# Altium PCB HASEL_Pair_Dual_Polarity.PcbDoc
Units mm, origin at the board's own origin, x right, y up, seen from the top; angles counter-clockwise.
Board outline 172.59 x 105.79 mm, 2 copper layers (Top Layer, Bottom Layer); 64 components, 65 nets, 264 pads, 50 vias.
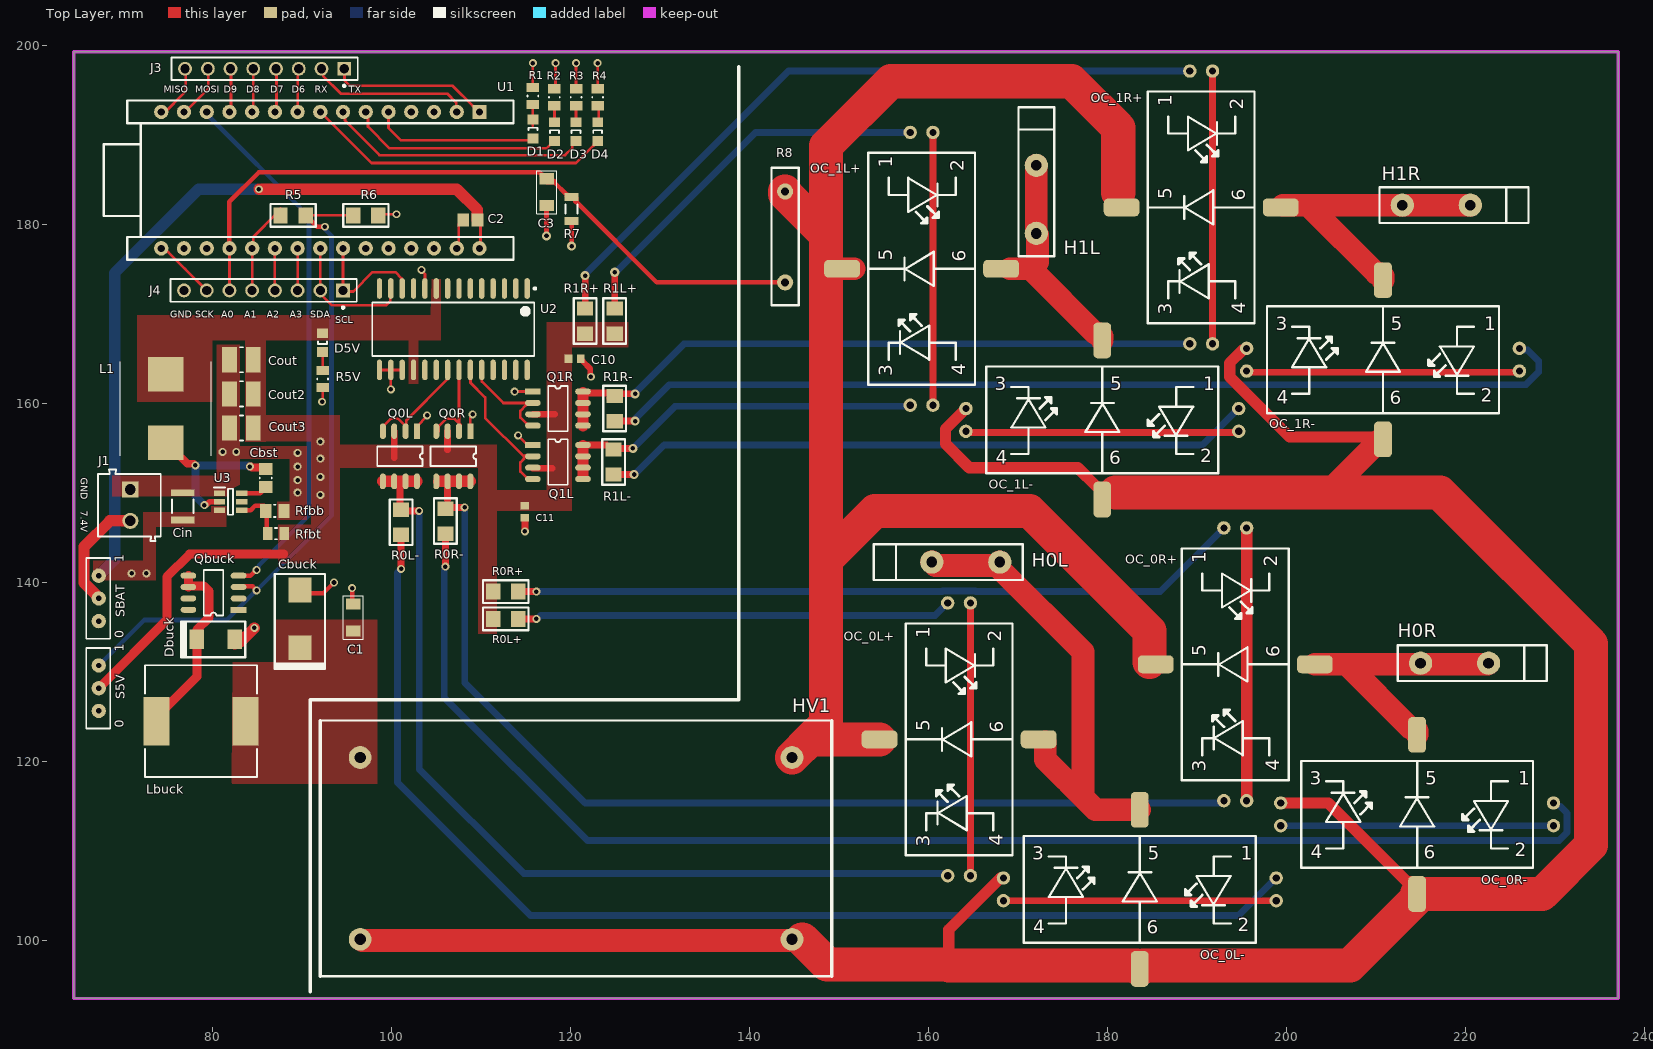
[diagram p0: Top Layer view]
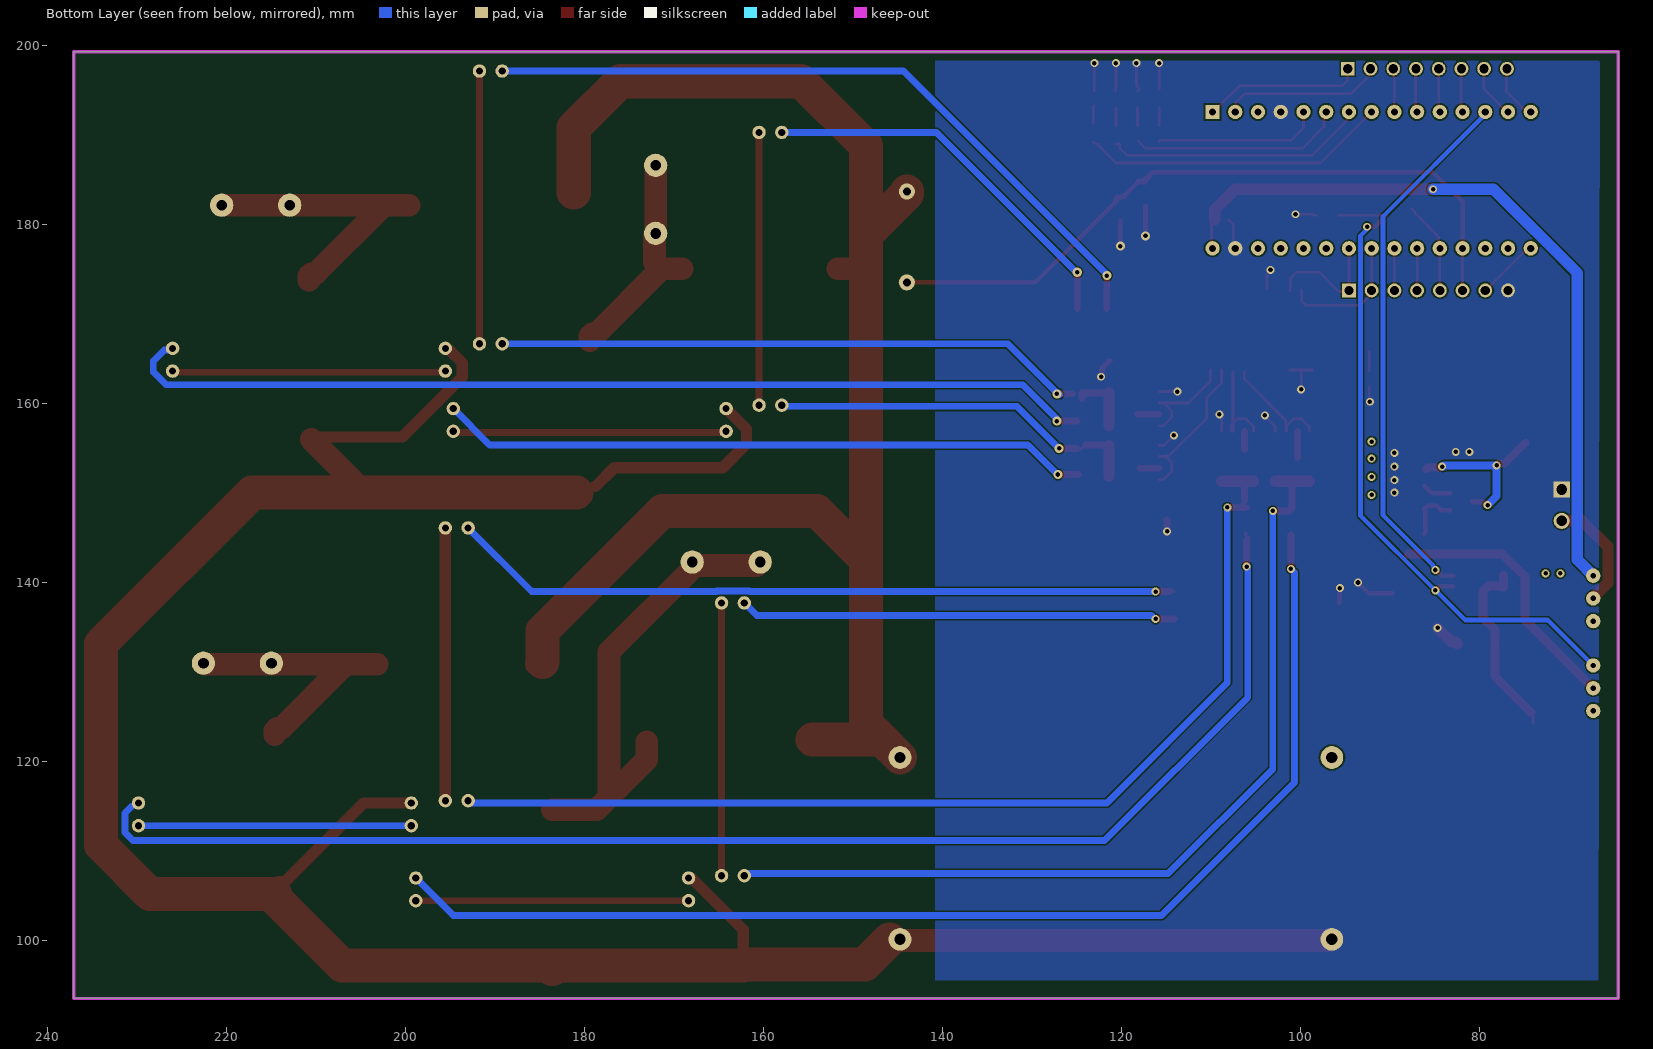
[diagram p1: Bottom Layer view, seen from below]

## Layer stack, top to bottom
Top Solder: solder mask 0.0102, Solder Resist, Dk 3.5
Top Layer: signal copper 0.0356
Dielectric 1: dielectric 0.32, FR-4, Dk 4.8
Bottom Layer: signal copper 0.0356
Bottom Solder: solder mask 0.0102, Solder Resist, Dk 3.5

## Board outline
64.516,93.472 237.109,93.472 237.109,199.263 64.516,199.263

## Design rules (kind name [scope] priority, off if disabled: settings)
Clearance [All] p1: gap=0.191 ignorepadtopadclearanceinfootprint=TRUE
PolygonConnect [All] p1: connectstyle=Direct reliefconductorwidth=0.254 reliefentries=4 polygonreliefangle="90 Angle" airgapwidth=0.254
RoutingVias [All] p1: holewidth=0.711 width=1.27 viastyle="Through Hole" minholewidth=0.381 minwidth=0.635 maxholewidth=0.711 maxwidth=1.27
SilkToSilkClearance [All] p1: silktosilkclearance=0.178
SilkToSolderMaskClearance [IsPad] p1: minsilkscreentomaskgap=0.152 clearancetoexposedcopper=TRUE
SolderMaskExpansion [All] p1: expansion=0.102 istentingtop=FALSE
Width [All] p1: maxlimit=5.08 minlimit=0.254 preferedwidth=0.305 minimp=50.000000 maximp=50.000000 favimp=50.000000
28 further rules are at their usual default settings.

## Classes and differential pairs
component class Control: C1 C2 Cbst Cbuck Cin Cout Cout2 Cout3 D1 D2 D3 D4 D5V Dbuck HV1 J1 J3 J4 L1 Lbuck Qbuck R1 R2 R3 R4 R5 R5V R6 Rfbb Rfbt S5V SBAT U1 U2 U3
component class Hbridge0: C3 C10 C11 H0L H0R H1L H1R OC_0L+ OC_0L- OC_0R+ OC_0R- OC_1L+ OC_1L- OC_1R+ OC_1R- Q0L Q0R Q1L Q1R R0L+ R0L- R0R+ R0R- R1L+ R1L- R1R+ R1R- R7 R8

## Components (designator, comment, footprint, x,y, rotation, side; value= is the part's Value field where it differs from the comment)
C1 "Capacitor 10uF" "1206 CAP" 95.758,136.041 r270 top value=10uF
C2 "C0805C104K5RACTU" CAPC2013X88X50NL20T25 108.839,180.467 r0 top
C3 "Capacitor 0.33uF" "1206 CAP" 117.384,183.575 r90 top value=0.33uF
C10 "GRM1885C1H101JA01D" CAPC1608X90X35NL10T15 120.483,164.973 r180 top
C11 "GRM1885C1H101JA01D" CAPC1608X90X35NL10T15 114.935,147.868 r90 top
Cbst "CAP 100nF 50V 0805(2012)" CAPC0805(2012)100_M 85.979,151.638 r90 top value=100nF
Cbuck "Capacitor 220uF (Polarized)" "SMD 7343 - Pol" 89.789,135.89 r270 top value=220uF
Cin "GRM32ER61C226KE20L" MURA-1210_H_2.7_L 76.708,148.463 r270 top
Cout "CL32B106KBJNNWE" FP-CL32-IPC_B 83.257,164.846 r180 top
Cout2 "CL32B106KBJNNWE" FP-CL32-IPC_B 83.257,161.036 r180 top
Cout3 "CL32B106KBJNNWE" FP-CL32-IPC_B 83.257,157.226 r180 top
D1 "150080SS75000" 0805_A 115.824,190.627 r270 top
D2 "150080VS75000" 0805_A 118.237,190.339 r270 top
D3 "150080SS75000" 0805_A 120.65,190.339 r270 top
D4 "150080VS75000" 0805_A 123.063,190.339 r270 top
D5V "150080VS75000" 0805_A 92.329,166.751 r90 top
Dbuck "Schottky Diode" "Schottky Diode" 80.391,133.604 r180 top
H0L "HV Socket" "HV Socket 2mm" 160.401,142.24 r0 top
H0R "HV Socket" "HV Socket 2mm" 222.611,130.937 r180 top
H1L "HV Socket" "HV Socket 2mm" 172.085,186.563 r270 top
H1R "HV Socket" "HV Socket 2mm" 220.579,182.118 r180 top
HV1 "5VV9 (5W)" 5VV9 92.075,95.948 r0 top
J1 "PWR Terminal Block" 691103110002 70.739,148.59 r270 top
J3 "PPPC081LFBN-RC" SLIN-PPPC081LFBN-RC_V 85.852,197.358 r180 top
J4 "PPPC081LFBN-RC" SLIN-PPPC081LFBN-RC_V 85.725,172.593 r180 top
L1 "7443251600" WE-HCI_105023 74.803,159.385 r90 top
Lbuck "7447709821" WE-PD-XXL 78.74,124.46 r0 top
OC_0L+ "OC100HG" OC100G 163.449,122.428 r180 top
OC_0L- "OC100HG" OC100G 183.642,105.664 r90 top
OC_0R+ "OC100HG" OC100G 194.31,130.81 r180 top
OC_0R- "OC100HG" OC100G 214.63,114.046 r90 top
OC_1L+ "OC100HG" OC100G 159.258,175.006 r180 top
OC_1L- "OC100HG" OC100G 179.451,158.115 r90 top
OC_1R+ "OC100HG" OC100G 190.5,181.864 r180 top
OC_1R- "OC100HG" OC100G 210.82,164.846 r90 top
Q0L "Dual MOSFET" SO-8 102.87,156.857 r270 top
Q0R "Dual MOSFET" SO-8 108.839,156.857 r270 top
Q1L "Dual MOSFET" SO-8 115.824,155.321 r0 top
Q1R "Dual MOSFET" SO-8 115.824,161.29 r0 top
Qbuck "Dual MOSFET" SO-8 82.931,136.906 r180 top
R0L+ "Resistor" "1206 R" 114.179,135.89 r90 top value=27R
R0L- "Resistor" "1206 R" 101.092,148.082 r180 top value=27R
R0R+ "Resistor" "1206 R" 114.179,138.938 r90 top value=27R
R0R- "Resistor" "1206 R" 106.045,148.209 r180 top value=27R
R1 "ERJ-6GEYJ161V" RESC0805(2012)_N 115.824,194.31 r270 top value="160.00 Ohm"
R1L+ "Resistor" "1206 R" 124.968,170.561 r180 top value=27R
R1L- "Resistor" "1206 R" 124.841,154.813 r180 top value=27R
R1R+ "Resistor" "1206 R" 121.666,170.561 r180 top value=27R
R1R- "Resistor" "1206 R" 124.968,160.788 r180 top value=27R
R2 "ERJ-6GEYJ161V" RESC0805(2012)_N 118.237,194.183 r270 top value="160.00 Ohm"
R3 "ERJ-6GEYJ161V" RESC0805(2012)_N 120.65,194.183 r270 top value="160.00 Ohm"
R4 "ERJ-6GEYJ161V" RESC0805(2012)_N 123.063,194.183 r270 top value="160.00 Ohm"
R5 "Resistor" "1206 R" 90.43,180.975 r90 top value=1k
R5V "ERJ-6GEYJ161V" RESC0805(2012)_N 92.329,162.687 r90 top value="160.00 Ohm"
R6 "Resistor" "1206 R" 98.558,180.975 r90 top value=1k
R7 "ERJ-8ENF8062V" RESC3216X70X50LL05T20 120.142,181.682 r90 top
R8 "Resistor" "HV resistor" 144.018,173.482 r90 top value=100M
Rfbb "CRCW080513K7FKEA" RESC2013X50X30ML20T20 86.995,147.955 r180 top
Rfbt "CRCW0805100KFKEA" RESC2013X50X30NL20T20 87.122,145.415 r0 top
S5V "Slider Switch" "Slide Switch" 67.31,128.143 r180 top
SBAT "Slider Switch" "Slide Switch" 67.31,138.176 r180 top
U1 "Arduino Nano" "Arduino Nano" 104.775,192.532 r270 top
U2 "MCP23017-E/SO" SOIC-SO28_N 106.934,168.253 r270 top
U3 "TPS54308DDCR" SOT95P280X100-6N 82.042,148.971 r0 top

## Footprints (in the part's own frame and the unit in brackets; to place one, negate y for a bottom-side part, rotate by r counter-clockwise, add the part's x,y. Pads: shape width x height; smd on the part's side, far side on the other; paste and mask are expansions set on the pad)
5VV9 [mil]
  round 100 hole 50: 1(175,962.5) 2(175,162.5) 3(2075,962.5) 4(2075,162.5)
  silkscreen extent 0,0 2250,1125, body extent -5,0 2250,1125, height 10
0805_A [mm] "Chip LED, 2-Leads, Body 2.0x1.3mm, IPC Medium Density"
  rect 1.1x1.2 smd: 1(-1.05,0) 2(1.05,0)
  silkscreen extent -0.15,-0.5 0.15,0.5, body extent -1,-0.62 1,0.63, height 0.68
"1206 CAP" [mm]
  rect 1.25x1.6 smd: 1(-1.5,0) 2(1.5,0)
  silkscreen extent -2.41,-1.1 2.41,1.1, body extent -1.55,-0.8 1.55,0.8, height 1.05
"1206 R" [mm]
  rect 1.8x1.6 smd: 1(0,0) 2(0,2.8)
  silkscreen extent -1.27,-1.14 1.27,3.94, body extent -0.8,-0.4 0.8,3.2, height 0.25
691103110002 [mm] "3,50mm - modular - blue - Horizontal wire entry - Pressure clamp - 8,4mm height - 02p"
  rect 1.8x1.8 hole 1.2: 1(-1.75,0.1)
  round 1.8 hole 1.2: 2(1.75,0.1)
  silkscreen extent -4,-3.5 4,3.5, body extent -4,-3.5 4,3.5, height 8.45
"Arduino Nano" [mm]
  rect 1.6x1.6 hole 0.8: 1(0,5.08)
  round 1.6 hole 0.8: 2(0,2.54) 3(0,0) 4(0,-2.54) 5(0,-5.08) 6(0,-7.62) 7(0,-10.16) 8(0,-12.7) 9(0,-15.24) 10(0,-17.78) 11(0,-20.32) 12(0,-22.86) 13(0,-25.4) 14(0,-27.94) 15(0,-30.48) 16(15.24,5.08) 17(15.24,2.54) 18(15.24,0) 19(15.24,-2.54) 20(15.24,-5.08) 21(15.24,-7.62) 22(15.24,-10.16) 23(15.24,-12.7) 24(15.24,-15.24) 25(15.24,-17.78) 26(15.24,-20.32) 27(15.24,-22.86) 28(15.24,-25.4) 29(15.24,-27.94) 30(15.24,-30.48)
  silkscreen extent -1.27,-36.89 16.51,8.89, body extent -1.4,-34.29 16.51,8.89, height 8.26
CAPC0805(2012)100_M [mm] "Chip Capacitor, Body 2.0x1.2mm, Height 1.0mm, IPC Low Density"
  rect 1.35x1.55 smd: 1(-1,0) 2(1,0)
  silkscreen extent -0.05,-0.67 0.05,0.67, body extent -1.1,-0.72 1.1,0.72, height 1
CAPC1608X90X35NL10T15 [mm] "Chip Capacitor, 2-Leads, Body 1.60x0.80mm, IPC Medium Density"
  rect 0.85x0.95 smd: 1(-0.675,0) 2(0.675,0)
  body extent -0.85,-0.45 0.85,0.45, height 0.9
CAPC2013X88X50NL20T25 [mm] "Chip Capacitor, 2-Leads, Body 2.00x1.25mm, IPC Medium Density"
  rect 1.3x1.45 smd: 1(-0.8,0) 2(0.8,0)
  body extent -1.1,-0.72 1.1,0.72, height 0.88
FP-CL32-IPC_B [mm]
  rect 1.653x2.804 smd paste+0 mask+0: 1(-1.325,0) 2(1.325,0)
  silkscreen extent -0.2,-1.4 0.2,1.4, body extent -2.4,-1.65 2.4,1.65, height 0.25
"HV resistor" [mm]
  round 1.8 hole 0.9 mask+0.102: 1(-0.002,0)
  round 1.8 hole 0.9: 2(10.16,0)
  silkscreen extent -2.54,-1.5 12.83,1.52, body extent -2.54,-1.27 12.83,1.27, height 8.64
"HV Socket 2mm" [mm]
  round 2.6 hole 1.2: 1(0,0) 2(7.6,0)
  silkscreen extent -6.5,-2 10.16,2, body extent -6.4,-2 8.5,2.1, height 6
MURA-1210_H_2.7_L [mm] "Chip Capacitor, 2-Leads, Body 3.5x2.7mm, IPC High Density"
  rect 0.75x2.6 smd: 1(-1.525,0) 2(1.525,0)
  silkscreen extent -0.75,-1.2 0.75,1.2, body extent -1.75,-1.35 1.75,1.35, height 2.7
OC100G [mm]
  round 1.5 hole 0.8: 1(1.27,-15.24) 2(-1.27,-15.24) 3(1.27,15.24) 4(-1.27,15.24)
  rrect50% 4x2 smd: 5(8.89,0) 6(-8.89,0)
  silkscreen extent -5.97,-12.95 5.97,12.95, body extent -9.53,-16.51 9.53,16.51, height 8.13
RESC0805(2012)_N [mm] "Chip Resistor, Body 2.0x1.3mm, IPC Medium Density"
  rect 1.05x1.4 smd: 1(-0.95,0) 2(0.95,0)
  silkscreen extent -0.05,-0.6 0.05,0.6, body extent -1.1,-0.67 1.1,0.68, height 0.7
RESC2013X50X30ML20T20 [mm] "Chip Resistor, 2-Leads, Body 2.00x1.25mm, IPC Low Density"
  rect 1.25x1.55 smd: 1(-1.025,0) 2(1.025,0)
  silkscreen extent -0.1,-0.67 0.1,0.67, body extent -1.1,-0.72 1.1,0.72, height 0.5
RESC2013X50X30NL20T20 [mm] "Chip Resistor, 2-Leads, Body 2.00x1.25mm, IPC Medium Density"
  rect 1.05x1.45 smd: 1(-0.925,0) 2(0.925,0)
  silkscreen extent -0.1,-0.63 0.1,0.63, body extent -1.1,-0.72 1.1,0.72, height 0.5
RESC3216X70X50LL05T20 [mm] "Chip Resistor, 2-Leads, Body 3.20x1.60mm, IPC High Density"
  rect 0.9x1.55 smd: 1(-1.325,0) 2(1.325,0)
  silkscreen extent -0.5,-0.67 0.5,0.67, body extent -1.63,-0.82 1.62,0.82, height 0.7
"Schottky Diode" [mm]
  rect 1.62x2.18 smd: 1(-2.11,0) 2(2.11,0)
  silkscreen extent -3.3,-2 3.9,2
"Slide Switch" [mm]
  round 1.6 hole 0.6: 1(0,2.54) 2(0,0) 3(0,-2.54)
  silkscreen extent -1.3,-4.5 1.4,4.5, body extent -1,-4 4.5,4, height 0.25
SLIN-PPPC081LFBN-RC_V [mm] "THD, 8-Leads, Body 20.82x2.54mm, Pitch 2.54mm"
  rect 1.55x1.55 hole 1.02: 1(-8.89,0)
  round 1.55 hole 1.02: 2(-6.35,0) 3(-3.81,0) 4(-1.27,0) 5(1.27,0) 6(3.81,0) 7(6.35,0) 8(8.89,0)
  silkscreen extent -10.41,-1.27 10.41,2.04, body extent -10.41,-1.27 10.41,1.27, height 8.5
"SMD 7343 - Pol" [mm]
  rect 2.77x2.55 smd: 1(3.22,0) 2(-3.22,0)
  silkscreen extent -5,-2.8 5.6,2.8
SO-8 [mm]
  rect 1.75x0.67 smd: 1(0,0)
  oval 1.75x0.67 smd: 2(0,-1.27) 3(0,-2.54) 4(0,-3.81) 5(5.6,-3.81) 6(5.6,-2.54) 7(5.6,-1.27) 8(5.6,0)
  silkscreen extent 1.71,-4.44 3.89,0.64
SOIC-SO28_N [mm] "SOIC, 28-Leads, Body 17.9x7.5mm, Pitch 1.27mm, IPC Medium Density"
  oval 2.3x0.6 smd: 1(-4.55,8.255) 2(-4.55,6.985) 3(-4.55,5.715) 4(-4.55,4.445) 5(-4.55,3.175) 6(-4.55,1.905) 7(-4.55,0.635) 8(-4.55,-0.635) 9(-4.55,-1.905) 10(-4.55,-3.175) 11(-4.55,-4.445) 12(-4.55,-5.715) 13(-4.55,-6.985) 14(-4.55,-8.255) 15(4.55,-8.255) 16(4.55,-6.985) 17(4.55,-5.715) 18(4.55,-4.445) 19(4.55,-3.175) 20(4.55,-1.905) 21(4.55,-0.635) 22(4.55,0.635) 23(4.55,1.905) 24(4.55,3.175) 25(4.55,4.445) 26(4.55,5.715) 27(4.55,6.985) 28(4.55,8.255)
  silkscreen extent -4.67,-9.05 3,9.23, body extent -3.8,-9.05 3.8,9.05, height 2.65
SOT95P280X100-6N [mm]
  rect 1.25x0.6 smd: 1(-1.25,0.95) 2(-1.25,0) 3(-1.25,-0.95) 4(1.25,-0.95) 5(1.25,0) 6(1.25,0.95)
  silkscreen extent -1.88,-1.45 0.28,1.6, body extent -1.4,-1.45 1.4,1.45, height 1
WE-HCI_105023 [mm]
  rect 3.85x4 smd: 1(-3.825,0) 2(3.825,0)
  silkscreen extent -5.25,-5.1 5.25,5.1
WE-PD-XXL [mm] "SMD Inductor, 2-Leads, Body 12.0 x 12.0 mm"
  rect 2.9x5.4 smd: 1(-4.95,0) 2(4.95,0)
  silkscreen extent -6.25,-6.25 6.25,6.25, body extent -6,-6 6,6, height 10.36

## Part data
C1: "1276-3038-6-ND / Manufacturer: CL31A106KAHNFNE"
C2: library part CMP-2007-00279-1, Manufacturer=Kemet, Part Number=C0805C104K5RACTU
C3: "‎399-1285-1-ND‎ Manufacturer: ‎C1206C334K3RACTU‎"
C10 C11: library part CMP-2006-02595-1, Manufacturer=Murata, Part Number=GRM1885C1H101JA01D
Cbst: library part CMP-1036-04423-1, "CAP 100nF 50V ±20% 0805 (2012 Metric) Thickness 1mm SMD", Case-EIA=0805, Case-Metric=2012, Rated Voltage="50 V", Tolerance=Â±20%, Max Thickness="1 mm", Technology=SMT
Cbuck: "Digikey: ‎399-8415-1-ND‎ / Manufacturer: ‎T491X227K016AT‎", LatestRevisionDate=17-Jul-2002, LatestRevisionNote="Re-released for DXP Platform.", PackageDescription="Polarized Capacitor (Radial); 2 Leads", PackageReference=RB7.6-15, Published=8-Jun-2000, Publisher="Altium Limited"
Cin: library part CMP-2000-06361-1, "Chip Monolithic Ceramic Capacitor, 22 uF, +/- 10%, -55 to 85 degC, 2-Pin SMD (1210), RoHS, Tape and Reel", Capacitance=22µF, Manufacturer=Murata, Operating Temperature=-55°C~85°C, Package / Case=1210(3225Metric), Package Description="2-Pin Surface Mount Device, Body 3.2 x 2.5 mm", Package Reference=1210, Ratings=-, Standard Package=1,000, Temperature Coefficient=X5R, Tolerance=±10%, Voltage - Rated=16V, Applications=GeneralPurpose, Catalog Drawings=GRMSeries_1210_2.5, Category=Capacitors, Datasheet URL=https://datasheet.ciiva.com/26915/getdatasheetpartid-88858-26915376.pdf, Datasheet Version=05/2014, Family=CeramicCapacitors, Featured Product=GA3SafetyRecognizedCapsandHi-CapMLCC, Features=-, Height - Seated (Max)=-, Lead Spacing=-, Lead Style=-, Manufacturer URL=http://www.murata.com/, Mounting Technology=SurfaceMount, Mounting Type=SurfaceMount,MLCC, Online Catalog=GRMSeries, Other Names=490-1882-2, Packaging=Tape&Reel(TR), Product Training Modules=High-CapMultilayerCeramicCapacitors, Series=GRM, Size / Dimension="0.126\"Lx0.098\"W(3.20mmx2.50mm)", Thickness (Max)="0.106\"(2.70mm)", Voltage Rating Dc=16V
Cout Cout2 Cout3: library part CMP-13271-004028-1, "Cap Ceramic 10uF 50V X7R ±10% SMD 1210 +125°C Embossed T/R", Capacitance=10uF, Case Code (Imperial)=1210, Case Code (Metric)=3225, Dielectric=X7R, Max Operating Temperature=125°C, Min Operating Temperature=-55°C, Package Quantity=1, Tolerance=10%, Voltage Rating=50V, Case/Package=1210, Lead Free="Lead Free", Length=0.126inch, Mount="Surface Mount", Packaging="Tape and Reel", Thickness=0.106inch, Width=0.098inch
D1 D3: library part CMP-1426-00010-1, "SMD mono-color Chip LED, WL-SMCW, Super Red", Color="Super Red", Manufacturer="Wuerth Elektronik", ComponentLink1Description="Manufacturer URL", ComponentLink1URL=http://www.we-online.com, ComponentLink2Description=Datasheet, ComponentLink2URL=http://katalog.we-online.com/led/datasheet/150080SS75000.pdf, PackageReference=0805_A, PartNumber=150080SS75000
D2 D4 D5V: library part CMP-1426-00009-1, "SMD mono-color Chip LED, WL-SMCW, Bright Green", Color="Bright Green", Manufacturer="Wuerth Elektronik", ComponentLink1Description="Manufacturer URL", ComponentLink1URL=http://www.we-online.com, ComponentLink2Description=Datasheet, ComponentLink2URL=http://katalog.we-online.com/led/datasheet/150080VS75000.pdf, PackageReference=0805_A, PartNumber=150080VS75000
H0L H0R H1L H1R: "Black: 486-3654-ND / Red: ‎486-3655-ND‎"
HV1: library part 5VV9
J1: library part CMP-1502-03254-1, "Series 1031 - 3.50 mm Horizontal Entry Modular with Pressure Clamp WR-TBL, 2 pin", Manufacturer="Wurth Elektronik", Operating Temperature=-40to105degC, Package Reference=691103110002, Datasheet URL=http://katalog.we-online.de/em/datasheet/6911031100xx.pdf, Manufacturer URL=http://www.we-online.de, Mounting Technology=THT, Packaging=Box, Part Number=691103110002, Pin Number=2, Pitch=3.50mm, Publisher=WurthElektronik
J3 J4: library part CMP-1770-00002-1, "Female Header, Pitch 2.54 mm, 1 x 8 Position, Height 8.5 mm, Tail Length 3.2 mm, -40 to 105 degC, RoHS, Bulk", Case\Package=TO-252-3, Input Capacitance="350 pF", Max Operating Temperature="150 degC", Max Power Dissipation="2.5 W", Min Operating Temperature="-55 degC", Package Quantity=2500, ComponentLink1Description=Datasheet, ComponentLink1URL=http://sullinscorp.com/catalogs/101_PAGE114-115_.100_FEMALE_HDR.pdf, DatasheetVersion=Jan-15, Elements=1, Height="2.39 mm", Length="6.73 mm", Mount="Surface Mount", PackageDescription="Female Header, Pitch 2.54 mm, 1 x 8 Position, Height 8.5 mm, Tail Length 3.2 mm", PackageReference=PPPC081LFBN-RC, Packaging="Tape and Reel", Pins=3, Radiation Hardening=No, Rds On Max="115 mohm", REACH SVHC="No SVHC", RoHSCompliant=true, Typical Rise Time="90 ns", Width="6.22 mm"
L1: "Inductor", Manufacturer_Name="Wurth Elektronik", Mouser Part Number=710-7443251600, Manufacturer_Part_Number=7443251600, Mouser Price/Stock=https://www.mouser.co.uk/ProductDetail/Wurth-Elektronik/7443251600?qs=VxkwJfKV0FSkbbPOgC7FsA%3D%3D
Lbuck: library part CMP-0227-00163-1, "SMD-Shielded Power Inductor WE-PD, L = 820 µH", Inductance="820 ÂµH", ComponentLink1Description="Manufacturer Link", ComponentLink1URL=http://www.we-online.com, ComponentLink2Description=Datasheet, ComponentLink2URL=http://www.we-online.de/katalog/media/pdf/7447709821.pdf, DatasheetVersion="ver 1, Jan-2007", PackageDescription="SMD Inductor, 2-Leads, Body 12.0 x 12.0 mm", PackageReference=WE-PD-XXL, PackageVersion=2004
R0L+ R0L- R0R+ R0R- R1L+ R1L- R1R+ R1R-: library part "Resistor 27R", "Manufacturer ‎HRG3216Q-27R0-D-T1‎ / Digikey ‎408-1908-1-ND"
R1 R2 R3 R4 R5V: library part CMP-1013-00055-1, "160R 0.125W 5% 0805 (2012 Metric)  SMD", Case-EIA=0805, Case-Metric=2012, Power="0.125 W", Tolerance="5 %", Technology=SMT
R5 R6: library part "Resistor 1k", "‎541-2245-1-ND‎ / Manufacturer: ‎RCA12061K00FKEA‎"
R7: library part CMP-2003-00504-1, Manufacturer=Panasonic, Part Number=ERJ-8ENF8062V
R8: library part "Resistor 100M", "Digikey:‎SM102031006FE-ND‎ / Manufacturer: ‎SM102031006FE-ND‎"
Rfbb: library part CMP-2001-04947-1, Manufacturer="Vishay Dale", Part Number=CRCW080513K7FKEA
Rfbt: library part CMP-2001-04899-1, Manufacturer="Vishay Dale", Part Number=CRCW0805100KFKEA
S5V SBAT: library part Switch-SPST, "Digikey: ‎563-1571-ND‎ / Manufacturer:‎ MHS122-1‎", LatestRevisionDate=17-Jul-2002, LatestRevisionNote="Re-released for DXP Platform.", PackageDescription="Switch; 2 Leads", PackageReference=SPST-2, Published=24-Mar-1999, Publisher="Altium Limited"
U2: library part CMP-0186-00161-2, "16-Bit I/O Expander with Serial Interface, 28-Pin SOIC, Extended Temperature", Code_JEDEC=MS-013, ComponentLink1Description="Manufacturer URL", ComponentLink1URL=http://www.microchip.com/, ComponentLink2Description=Datasheet, ComponentLink2URL=http://ww1.microchip.com/downloads/en/DeviceDoc/21952b.pdf, ComponentLink3Description="Package Specification", ComponentLink3URL=http://www.microchip.com/stellent/groups/techpub_sg/documents/packagingspec/en012702.pdf, DatasheetVersion="revB, Feb-2007", PackageDescription="28-Lead Plastic Small Outline (SO) - Wide 7.50mm Body [SOIC]", PackageReference=SOIC-SO28, PackageVersion="revBB, Aug-2009", RevisionNote="URLs added."
U3: "Power Supply", Manufacturer_Name="Texas Instruments", Mouser Part Number=595-TPS54308DDCR, Arrow Part Number=TPS54308DDCR, Arrow Price/Stock=https://www.arrow.com/en/products/tps54308ddcr/texas-instruments, Datasheet Link=http://www.ti.com/lit/gpn/tps54308, Height=1mm, Manufacturer_Part_Number=TPS54308DDCR, Mouser Price/Stock=https://www.mouser.co.uk/ProductDetail/Texas-Instruments/TPS54308DDCR?qs=gt1LBUVyoHl9iRtozvTSQw%3D%3D

## Via types
v1: diameter 0.889, hole 0.508, Top Layer to Bottom Layer, 42 vias
v2: diameter 1.016, hole 0.508, Top Layer to Bottom Layer, 8 vias

## Nets (pads, with @x,y where several pads share a name; then routed paths per layer and width w, separated by ;. In a path a pad name is that pad's centre, name@x,y a point inside that pad or via, vN(x,y) a via of type N, cw(c..) or ccw(c..) an arc to the next point about the centre after c; other vN are vias at no path point)
5V: C10.2 C11.2 Cout2.1 Cout3.1 Cout.1 D5V.2 L1.2 Q0L.3 Q0R.3 Q1L.3 Q1R.3 R0L+.2 R0R+.2 R1L+.2 R1R+.2 Rfbt.2 S5V.2 U2.9 U2.18 | length 39.4
  Top Layer w0.305: 118.237,158.75 118.364,158.877
  Top Layer w0.762: 100.33,153.924 Q0L.3 ; 106.299,154.795 Q0R.3 ; Q1L.3@115.824,152.718 117.983,152.718 ; Q1R.3 118.237,158.75
  Top Layer w1.016: S5V.2 74.93,135.763 74.93,140.589 77.47,143.129 87.965,143.129
  other v1: 92.075,149.733 92.075,151.765 92.075,153.797 92.075,155.702
7.4V: C2.2 Cin.2 SBAT.3 U1.16 U3.3 | length 84.4
  Top Layer w0.305: C2.2 109.982,180.124 U1.16@109.982,177.292
  Top Layer w1.27: v1(85.217,183.896) 107.326,183.896 109.624,181.598 109.624,180.482 C2.2
  Bottom Layer w1.27: SBAT.3 69.088,142.494 69.088,174.522 78.462,183.896 v1(85.217,183.896)
  other v1: 70.993,140.97 72.644,140.97
A0: C3.2 J4.6 R7.2 R8.1 U1.27 | length 78.1
  Top Layer w0.305: J4.6 U1.27
  Top Layer w0.508: U1.27 81.915,182.499 85.217,185.801 116.53,185.801 C3.2@116.902,185.429 ; C3.2@118.128,184.768 R7.2@119.685,183.211 ; 120.599,182.55 129.669,173.48 R8.1
  Top Layer w0.635: C3.2@116.902,185.429 116.902,185.383 117.209,185.075 C3.2 ; C3.2@117.384,184.811 117.427,184.768 C3.2@118.128,184.768 ; R7.2@119.685,183.14 R7.2@119.685,183.211 ; R7.2 120.467,183.007 120.599,182.874 120.599,182.55
A1: J4.5 R5.2 U1.26 | length 10.4
  Top Layer w0.305: J4.5 U1.26 ; U1.26@84.582,177.292 84.582,178.589 87.249,181.256 87.249,181.356 R5.2@87.63,181.737
A2: J4.4 U1.25 | length 4.7
  Top Layer w0.305: U1.25 86.995,172.787 87.062,172.72 J4.4@87.122,172.72
A3: J4.3 U1.24 | length 4.7
  Top Layer w0.305: J4.3@89.535,172.557 U1.24
A6: U1.21
D6: J3.3 U1.9 | length 4.6
  Top Layer w0.305: U1.9 J3.3@89.535,197.104
D7: J3.4 U1.10 | length 4.4
  Top Layer w0.305: U1.10@87.183,192.659 J3.4@87.183,197.104
D8: J3.5 U1.11 | length 5
  Top Layer w0.305: U1.11 84.582,192.659 J3.5@84.582,197.485
D9: J3.6 U1.12 | length 4.4
  Top Layer w0.305: U1.12@82.103,192.659 J3.6@82.103,197.104
GND: C1.1 C2.1 C3.1 C10.1 C11.1 Cbuck.2 Cin.1 Cout2.2 Cout3.2 Cout.2 Dbuck.1 HV1.2 HV1.4 J1.1 J4.8 OC_0L-.3 OC_0L-.6 OC_0R-.3 OC_0R-.6 OC_1L-.3 OC_1L-.6 OC_1R-.3 OC_1R-.6 Q0L.1 Q0R.1 Q1L.1 Q1R.1 R1.1 R2.1 R3.1 R4.1 R5V.1 R6.1 R7.1 Rfbb.1 U1.4 U1.17 U2.10 U2.15 U2.16 U2.17 U3.1 | length 374.1
  Top Layer w0.305: v1(92.265,160.147) 92.329,160.21 R5V.1 ; C1.1@95.631,137.668 C1.1 ; R6.1@98.298,180.975 R6.1 98.685,181.102 v1(100.584,181.102) ; U2.15 U2.16 ; v1(99.949,161.522) U2.16 ; U2.17 U2.16 ; Q0L.1 102.87,157.397 104.013,158.54 v1(104.013,158.623) ; v1(103.378,174.879) 103.378,174.791 103.759,174.41 U2.10 ; U1.17@107.442,177.292 107.541,177.391 107.541,179.969 C2.1 ; Q0R.1 108.839,158.338 109.093,158.592 v1(109.093,158.75) ; v1(113.792,161.29) Q1R.1 ; v1(114.173,156.4) 114.173,156.369 115.284,155.257 Q1L.1@115.824,155.257 ; C11.1@114.935,146.939 114.808,147.066 C11.1 ; R1.1@115.824,195.072 v1(115.824,197.993) ; C3.1@117.348,182.039 C3.1 ; R2.1@118.237,194.879 118.014,195.103 118.364,195.453 v1(118.364,197.993) ; R3.1@120.65,194.879 120.777,195.006 R3.1 v1(120.65,197.993) ; C10.1@121.366,164.715 C10.1@121.366,164.765 ; v1@122.238,163.004 v1(122.301,162.941) ; R4.1@123.063,194.879 v1(123.063,197.993) ; OC_0L-.3@168.296,106.934 OC_0L-.3 ; OC_1L-.6@178.797,150.691 179.917,150.691 180.78,149.828 ; OC_0L-.6 OC_0L-.6@183.642,97.774 ; OC_0R-.6 214.63,105.792 OC_0R-.6@215.451,106.613
  Top Layer w0.508: Cbuck.2@89.789,138.729 92.374,138.729 v1(93.599,139.954) ; C1.1@95.631,137.668 v1(95.631,139.319) ; v2(117.348,178.689) C3.1@117.348,182.039 ; v2(120.142,177.546) R7.1
  Top Layer w0.635: C10.1@121.366,164.715 122.238,163.843 v1@122.238,163.004
  Top Layer w0.762: v1(114.935,145.669) C11.1@114.935,146.939 ; OC_1R-.3@195.448,165.984 OC_1R-.3
  Top Layer w1.27: Dbuck.1@82.501,133.122 82.676,133.297 83.132,133.297 v1(84.709,134.874) ; 162.306,96.774 162.306,97.155 162.306,97.282 162.306,101.166 168.03,106.89 168.296,106.89 OC_0L-.3@168.296,106.934 ; OC_1L-.3 161.925,157.099 161.925,155.448 164.592,152.781 176.707,152.781 OC_1L-.6@178.797,150.691 ; OC_1R-.3@195.505,166.041 195.474,166.072 195.386,165.984 195.194,165.984 193.675,164.465 193.675,162.941 200.406,156.21 OC_1R-.6@210.947,156.21 ; OC_0R-.3 204.698,115.316 213.493,106.521 214.265,106.521 214.63,106.156 OC_0R-.6@214.63,105.792
  Top Layer w2.54: HV1.2@96.774,99.949 HV1.4@144.653,99.949 ; 180.78,149.828 180.939,149.987 ; 204.597,149.987 OC_1R-.6@210.566,155.956
  Top Layer w3.81: HV1.4@145.923,100.076 148.717,97.282 162.306,97.282 ; 162.306,97.155 183.261,97.155 OC_0L-.6 184.023,97.155 207.115,97.155 OC_0R-.6@214.63,104.67 ; 180.939,149.987 204.597,149.987 217.17,149.987 234.061,133.096 234.061,110.617 228.6,105.156 OC_0R-.6
  other v1: 89.535,149.987 89.535,151.384 89.535,152.908 89.535,154.432 81.153,154.559 82.677,154.559
HV: HV1.3 OC_0L+.5 OC_0R+.5 OC_1L+.5 OC_1R+.5 R8.2 | length 179
  Top Layer w2.54: OC_1L+.5 OC_1L+.5@151.746,175.006 ; OC_0R+.5@184.737,131.08 185.007,130.81 OC_0R+.5
  Top Layer w3.81: R8.2 144.018,183.388 148.59,178.816 ; HV1.3 146.812,122.428 ; OC_0L+.5 148.59,122.428 146.812,122.428 ; 181.229,183.538 181.229,190.754 176.022,195.961 155.829,195.961 148.59,188.722 148.59,178.816 ; OC_0R+.5@184.737,131.08 184.737,134.541 171.323,147.955 154.051,147.955 148.59,142.494 ; 146.812,122.428 148.59,124.206 148.59,142.494 ; 148.59,142.494 148.59,175.006 148.59,178.816
HV_Conv_In: C1.2 Cbuck.1 HV1.1 Lbuck.2
Left_0: Q0L.2 Q0L.4 U2.21 | length 12.3
  Top Layer w0.305: Q0L.4 99.06,157.397 99.905,158.242 100.786,158.242 Q0L.2@101.6,157.428 ; Q0L.2 Q0L.2@101.6,157.428 ; U2.21@106.299,163.471 106.299,162.687 101.67,158.058 101.67,157.498 Q0L.2@101.6,157.428
Left_1: Q1L.2 Q1L.4 U2.23 | length 16.7
  Top Layer w0.305: U2.23 108.849,163.693 108.849,162.274 110.49,160.633 110.49,158.347 114.808,154.029 114.966,154.029 115.115,154.029 Q1L.2@115.824,154.029 ; 114.827,153.778 114.427,153.379 114.427,152.337 115.316,151.447 Q1L.4@115.824,151.447 ; 114.827,154.01 Q1L.2@114.966,154.15
MISO: J3.8 U1.15 | length 5.9
  Top Layer w0.305: U1.15@74.483,192.278 77.023,194.818 J3.8@77.023,197.104
MOSI: J3.7 U1.14 | length 5.6
  Top Layer w0.305: U1.14@76.962,192.532 79.563,195.133 J3.7@79.563,197.104
NetCbst_1: Cbst.1 U3.6 | length 3.3
  Top Layer w0.508: U3.6 85.373,149.921 Cbst.1@86.217,150.765
NetD1_1: D1.1 R1.2 | length 2
  Top Layer w0.305: 115.824,191.008 R1.2@115.824,192.979
NetD1_2: D1.2 U1.5 | length 18.5
  Top Layer w0.305: U1.5 99.695,190.754 101.092,189.357 115.756,189.357 D1.2@115.824,189.289
NetD2_1: D2.1 R2.2 | length 2
  Top Layer w0.305: D2.1@118.237,191.008 R2.2@118.237,192.979
NetD2_2: D2.2 U1.6 | length 23.9
  Top Layer w0.305: U1.6@97.028,193.04 U1.6@97.276,192.792 ; U1.6@97.403,192.284 97.403,190.887 99.822,188.468 117.349,188.468 117.773,188.891 117.789,188.891 D2.2@118.187,189.289
NetD3_1: D3.1 R3.2 | length 1.9
  Top Layer w0.305: D3.1@120.65,191.042 R3.2@120.65,192.979
NetD3_2: D3.2 U1.7 | length 29.2
  Top Layer w0.305: U1.7@94.488,193.04 U1.7@94.691,192.837 ; U1.7@94.818,192.329 94.818,191.567 98.679,187.706 119.414,187.706 120.23,188.522 120.23,188.891 120.281,188.942 D3.2@120.65,188.942
NetD4_1: D4.1 R4.2 | length 2
  Top Layer w0.305: R4.2 123.19,193.106 D4.1@123.19,191.262
NetD4_2: D4.2 U1.8 | length 34.2
  Top Layer w0.305: U1.8 97.79,186.817 120.65,186.817 122.615,188.782 122.615,188.891 122.652,188.928 D4.2@122.761,188.928 ; D4.2@123.053,189.025 123.19,189.162 D4.2@123.14,189.162
NetD5V_1: D5V.1 R5V.2 | length 2.1
  Top Layer w0.305: R5V.2 D5V.1
NetDbuck_2: Dbuck.2 Lbuck.1 Qbuck.5 Qbuck.6 | length 20.5
  Top Layer w0.305: Lbuck.1@74.044,124.206 Lbuck.1@74.044,125.456
  Top Layer w1.016: Lbuck.1@74.298,125.456 78.281,129.439 Dbuck.2@78.281,132.842 ; Qbuck.6 77.458,139.573 79.034,139.573 79.629,138.978 79.629,136.014 78.281,134.666 Dbuck.2@78.281,133.22 ; Qbuck.5 77.331,139.457 Qbuck.6@77.342,139.446
NetH0L_1: H0L.1 H0L.2 OC_0L+.6 OC_0L-.5 | length 51.8
  Top Layer w0.305: OC_0L-.5 OC_0L-.5@183.642,115.554
  Top Layer w2.54: H0L.1 160.417,142.24 160.798,141.859 167.604,141.859 167.985,142.24 H0L.2 ; H0L.2@168.201,141.298 177.292,132.207 177.292,116.332 ; OC_0L+.6@173.069,122.158 173.069,120.174 175.249,117.994 ; 175.779,117.464 177.101,116.141 178.689,114.554 OC_0L-.5
NetH0R_1: H0R.1 H0R.2 OC_0R+.6 OC_0R-.5 | length 30.6
  Top Layer w2.54: OC_0R+.6 206.756,130.81 213.9,123.666 214.36,123.666 214.63,123.396 OC_0R-.5 ; 206.883,130.81 H0R.1@222.504,130.81
NetH1L_1: H1L.1 H1L.2 OC_1L+.6 OC_1L-.5 | length 26.8
  Top Layer w0.305: OC_1L+.6 OC_1L+.6@169.148,175.006
  Top Layer w2.54: OC_1L+.6@169.148,175.006 171.45,175.006 ; H1L.1 172.085,178.947 172.212,178.82 172.212,175.768 171.45,175.006 ; OC_1L-.5 179.451,167.465 179.181,167.735 178.721,167.735 171.45,175.006
NetH1R_1: H1R.1 H1R.2 OC_1R+.6 OC_1R-.5 | length 33.1
  Top Layer w0.305: OC_1R+.6 OC_1R+.6@199.644,182.118
  Top Layer w2.54: OC_1R+.6@199.644,182.118 202.692,182.118 H1R.2 H1R.1 ; 202.692,181.864 210.09,174.466 210.55,174.466 210.82,174.196 OC_1R-.5
NetJ1_2: J1.2 SBAT.2 | length 12.5
  Top Layer w1.27: SBAT.2 67.31,138.265 65.659,139.916 65.659,143.946 68.553,146.84 J1.2@70.458,146.84
NetOC_0L+_1: OC_0L+.1 R0L+.1 | length 48.7
  Top Layer w0.305: R0L+.1 R0L+.1@114.179,135.99
  Top Layer w0.762: R0L+.1 v1@116.084,135.89
  Bottom Layer w0.305: v1(116.211,135.89) v1@116.301,135.89
  Bottom Layer w0.762: v1@116.301,135.89 116.682,136.271 160.782,136.271 OC_0L+.1
NetOC_0L+_2: OC_0L+.2 OC_0L+.4 | length 30.5
  Top Layer w0.762: OC_0L+.4 OC_0L+.2
NetOC_0L+_3: OC_0L+.3 Q0L.5 Q0L.6 Q0L.7 Q0L.8 R0L-.1 | length 101.7
  Top Layer w0.305: R0L-.1@100.965,148.209 R0L-.1@101.219,147.955
  Top Layer w0.762: R0L-.1@100.965,148.209 100.965,151.257 ; R0L-.1@101.219,147.955 v1(103.124,147.955)
  Top Layer w1.27: Q0L.5 Q0L.6 100.965,151.257 Q0L.7 Q0L.8
  Bottom Layer w0.762: v1(103.124,147.955) 103.124,119.126 114.808,107.442 OC_0L+.3@162.052,107.442
NetOC_0L-_1: OC_0L-.1 R0L-.2 | length 133.9
  Top Layer w0.762: v1(101.092,141.478) R0L-.2
  Bottom Layer w0.762: v1(101.092,141.478) 101.092,141.444 100.711,141.063 100.711,117.602 115.57,102.743 194.691,102.743 OC_0L-.1
NetOC_0L-_2: OC_0L-.2 OC_0L-.4 | length 30.5
  Top Layer w0.762: OC_0L-.4 OC_0L-.2
NetOC_0R+_1: OC_0R+.1 R0R+.1 | length 82.1
  Top Layer w0.305: R0R+.1 114.433,139.192 R0R+.1@114.687,138.938
  Top Layer w0.762: R0R+.1@114.687,138.938 v1(116.211,138.938)
  Bottom Layer w0.305: v1(116.211,138.938) v1@116.301,138.938
  Bottom Layer w0.762: v1@116.27,138.938 161.58,138.938 161.632,138.99 165.266,138.99 165.318,138.938 185.928,138.938 OC_0R+.1
NetOC_0R+_2: OC_0R+.2 OC_0R+.4 | length 30.5
  Top Layer w1.27: OC_0R+.4 OC_0R+.2
NetOC_0R+_3: OC_0R+.3 Q0R.5 Q0R.6 Q0R.7 Q0R.8 R0R-.1 | length 120.3
  Top Layer w0.305: R0R-.1@106.299,148.463 106.172,148.336 R0R-.1 105.841,148.209 105.841,148.211 105.843,148.414 105.95,148.455 106.257,148.573 106.666,148.73 106.617,148.78 106.336,149.061 106.299,149.098 ; Q0R.8 Q0R.8@109.093,151.257
  Top Layer w0.762: R0R-.1@106.172,148.336 v1(108.204,148.336) ; 106.299,149.098 Q0R.6
  Top Layer w1.27: Q0R.5@105.283,151.257 Q0R.6 Q0R.7 Q0R.8
  Bottom Layer w0.762: v1(108.204,148.336) 108.204,128.778 121.666,115.316 OC_0R+.3@193.167,115.316
NetOC_0R-_1: OC_0R-.1 R0R-.2 | length 155.4
  Top Layer w0.305: R0R-.2@106.045,144.647 105.791,144.901 106.172,145.282 R0R-.2 R0R-.2@106.172,145.536
  Top Layer w0.762: v1(106.045,141.732) R0R-.2@106.045,144.647
  Bottom Layer w0.305: OC_0R-.1 230.193,115.316 230.552,114.958 230.609,114.958
  Bottom Layer w0.762: v1@105.918,141.732 105.918,127.127 121.92,111.125 230.505,111.125 231.394,112.014 231.394,114.173 230.609,114.958
NetOC_0R-_2: OC_0R-.2 OC_0R-.4 | length 30.5
  Bottom Layer w0.762: OC_0R-.4 OC_0R-.2
NetOC_1L+_1: OC_1L+.1 R1L+.1 | length 43.6
  Top Layer w0.762: R1L+.1 v2(124.968,174.625)
  Bottom Layer w0.762: v2(124.968,174.625) 125.037,174.625 125.164,174.752 125.222,174.752 140.716,190.246 OC_1L+.1
NetOC_1L+_2: OC_1L+.2 OC_1L+.4 | length 30.5
  Top Layer w0.762: OC_1L+.4 OC_1L+.2
NetOC_1L+_3: OC_1L+.3 Q1L.5 Q1L.6 Q1L.7 Q1L.8 R1L-.1 | length 42.7
  Top Layer w0.305: Q1L.6@121.424,152.718 Q1L.6@121.424,153.099 ; Q1L.7@121.424,153.987 Q1L.7@121.424,154.368 ; Q1L.8 121.424,155.257 Q1L.8@121.487,155.321 ; R1L-.1@124.079,155.321 R1L-.1@124.587,154.813
  Top Layer w0.762: Q1L.8@121.487,155.321 R1L-.1@124.079,155.321 ; R1L-.1@124.968,154.94 v2(127,154.94)
  Top Layer w1.27: Q1L.5@121.424,151.828 121.424,152.718 121.424,153.099 121.424,153.987 121.424,154.368 Q1L.8@121.424,155.257
  Bottom Layer w0.762: v2(127,154.94) 131.699,159.639 157.861,159.639 OC_1L+.3
NetOC_1L-_1: OC_1L-.1 R1L-.2 | length 72.9
  Top Layer w0.305: R1L-.2 R1L-.2@124.847,152.019
  Top Layer w0.762: R1L-.2@124.847,152.019 v2(127.127,152.019)
  Bottom Layer w0.762: v2(127.127,152.019) 127.196,152.019 130.498,155.321 190.627,155.321 OC_1L-.1
NetOC_1L-_2: OC_1L-.2 OC_1L-.4 | length 30.5
  Top Layer w0.762: OC_1L-.4@164.211,156.718 OC_1L-.2@194.691,156.718
NetOC_1R+_1: OC_1R+.1 R1R+.1 | length 80.8
  Top Layer w0.762: R1R+.1 v2(121.666,174.244)
  Bottom Layer w0.762: v2(121.666,174.244) 121.666,174.371 144.399,197.104 OC_1R+.1
NetOC_1R+_2: OC_1R+.2 OC_1R+.4 | length 30.5
  Top Layer w0.762: OC_1R+.4 OC_1R+.2
NetOC_1R+_3: OC_1R+.3 Q1R.5 Q1R.6 Q1R.7 Q1R.8 R1R-.1 | length 73.9
  Top Layer w0.305: R1R-.1@125.343,161.163 R1R-.1@125.47,161.036
  Top Layer w0.762: Q1R.8@121.424,161.141 124.449,161.141 124.454,161.136 R1R-.1@124.454,160.528 ; R1R-.1@125.47,161.036 v2(127.254,161.036)
  Top Layer w1.27: Q1R.5 Q1R.6 Q1R.7 Q1R.8@121.424,161.141
  Bottom Layer w0.762: v2@126.936,160.972 v2@127.127,161.163 ; v2(127.254,161.036) 127.254,161.105 127.381,161.232 127.381,161.29 132.715,166.624 OC_1R+.3
NetOC_1R-_1: OC_1R-.1 R1R-.2 | length 109.7
  Top Layer w0.762: R1R-.2 v2(127.254,157.988)
  Bottom Layer w0.305: OC_1R-.1 OC_1R-.1@226.228,165.948
  Bottom Layer w0.762: v2(127.254,157.988) 127.303,158.037 127.303,158.291 131.064,162.052 226.822,162.052 228.219,163.449 228.219,164.719 226.99,165.948 OC_1R-.1@226.228,165.948
NetOC_1R-_2: OC_1R-.2 OC_1R-.4 | length 30.5
  Top Layer w0.762: OC_1R-.4@195.58,163.449 OC_1R-.2@226.06,163.449
NetQbuck_3: Qbuck.3 R5.1 R6.2 S5V.3 | length 75.9
  Top Layer w0.305: Qbuck.3 Qbuck.3@82.995,139.51 ; R5.1@90.88,180.525 R5.1 R6.2
  Top Layer w0.508: Qbuck.3@82.995,139.51 84.519,139.51 v1(84.963,139.065) ; R5.1@90.88,180.525 91.7,179.705 v1(92.583,179.705)
  Bottom Layer w0.508: S5V.3 72.39,135.763 81.625,135.763 85.025,139.162 85.06,139.162 93.32,147.422 93.32,178.714 v1@92.329,179.705
NetRfbb_2: Rfbb.2 Rfbt.1 U3.4 | length 6.2
  Top Layer w0.508: U3.4 84.285,148.021 84.815,148.551 85.831,148.551 Rfbb.2@86.233,148.149 ; Rfbb.2@86.127,148.255 86.106,148.234 86.106,145.533 Rfbt.1@86.224,145.415
PWM: Qbuck.4 U1.13 | length 60.5
  Top Layer w0.305: v1@84.898,141.351 v1(84.951,141.351)
  Top Layer w0.508: Qbuck.4 84.263,140.716 v1@84.898,141.351
  Bottom Layer w0.508: U1.13@79.248,192.786 U1.13@79.248,193.04 ; U1.13@79.375,192.278 90.805,180.848 90.805,147.447 85.205,141.847 85.205,141.742 84.991,141.528 v1@84.886,141.528
Right_0: Q0R.2 Q0R.4 U2.22 | length 10.9
  Top Layer w0.305: Q0R.4@105.283,156.857 105.283,157.397 106.128,158.242 107.061,158.242 107.569,157.734 ; Q0R.2 107.569,157.607 107.569,157.734 ; U2.22@107.569,163.471 107.569,157.734 ; Q0R.2@107.753,156.927 107.753,157.168 107.753,157.55 107.696,157.607 107.569,157.734
Right_1: Q1R.2 Q1R.4 U2.24 | length 12
  Top Layer w0.305: U2.24 110.119,163.693 110.119,162.401 112.522,159.998 115.316,159.998 Q1R.2@115.062,159.998 ; Q1R.4 115.316,157.48 114.427,158.369 114.427,159.131 115.062,159.766 115.316,160.02 Q1R.2
RX: J3.2 U1.2 | length 17.8
  Top Layer w0.305: J3.2@92.193,197.104 92.387,196.91 92.387,196.538 94.361,194.564 106.299,194.564 107.255,193.608 U1.2@107.255,192.526
SCK: J4.7 U1.30 | length 7.1
  Top Layer w0.305: U1.30 74.645,177.292 75.039,176.898 75.07,176.898 76.962,175.006 79.248,172.72 J4.7@79.502,172.72
SCL: J4.1 U1.22 U2.12 | length 14
  Top Layer w0.305: U1.22 94.615,172.847 94.742,172.72 J4.1 94.742,172.466 95.758,172.466 97.917,174.625 100.457,174.625 101.163,173.919 101.163,172.627 U2.12@101.219,172.571
SDA: J4.2 U1.23 U2.13 | length 14.4
  Top Layer w0.305: J4.2@92.075,172.212 93.345,170.942 99.441,170.942 99.893,171.394 99.893,172.515 U2.13@99.949,172.571 ; U1.23 92.075,172.787 92.142,172.72 J4.2@92.202,172.72
SW: Cbst.2 L1.1 U3.2 | length 19.3
  Top Layer w0.305: L1.1 L1.1@74.878,155.56 ; v1@77.92,153.22 v1(78.105,153.035) ; v1(79.121,148.59) v1@79.313,148.59 ; U3.2 U3.2@80.94,149.119
  Top Layer w0.635: v1@79.313,148.59 79.694,148.971 U3.2
  Top Layer w0.889: L1.1@74.878,155.56 77.218,153.22 v1@77.92,153.22 ; v1(84.201,152.908) 84.304,152.908 84.414,152.798 85.819,152.798 Cbst.2
  Bottom Layer w0.889: v1(79.121,148.59) 78.105,149.606 v1(78.105,153.035) 83.971,153.035 84.098,152.908 v1(84.201,152.908)
TX: J3.1 U1.1 | length 17.9
  Top Layer w0.305: J3.1@94.615,197.104 94.78,196.939 94.78,196.05 95.377,195.453 106.868,195.453 109.141,193.18 109.334,193.18 U1.1@110.043,192.471
pads on no net: Qbuck.1 Qbuck.2 Qbuck.7 Qbuck.8 S5V.1 SBAT.1 U1.3 U1.18 U1.19 U1.20 U1.28 U1.29 U2.1 U2.2 U2.3 U2.4 U2.5 U2.6 U2.7 U2.8 U2.11 U2.14 U2.19 U2.20 U2.25 U2.26 U2.27 U2.28 U3.5

## Polygon pours and split planes (outlines as drawn)
5V on Top Layer "5V_L01_P022" (solid, pour order 22): 126.492,169.037 126.492,166.243 119.761,166.243 119.761,169.037
5V on Top Layer "5V_L01_P021" (solid, pour order 21): 110.998,150.241 117.348,150.241 117.348,169.037 120.142,169.037 120.142,147.955 110.998,147.955
5V on Top Layer "5V_L01_P020" (solid, pour order 20): 109.728,153.67 109.728,134.239 111.76,134.239 111.76,153.67
5V on Top Layer "5V_L01_P018" (solid, pour order 18): 93.903,155.321 111.76,155.321 111.76,152.781 93.903,152.781
HV_Conv_In on Top Layer "HV_CONV_IN_L01_P017" (solid, pour order 17): 87.122,130.048 87.122,135.763 98.425,135.763 98.425,130.048
5V on Top Layer "Top Layer-5V" (solid, pour order 11): 101.981,167.005 101.981,162.179 102.997,162.179 102.997,167.005 105.537,167.005 105.537,173.863 104.521,173.863 104.394,169.799 83.693,169.799 71.755,169.799 71.628,169.799 71.628,160.147 80.01,160.147 80.01,167.005 83.693,167.005 83.693,155.702 85.979,155.702 91.059,155.702 91.059,146.431 87.376,146.431 87.376,142.113 91.059,142.113 94.234,142.113 94.234,158.623 86.042,158.623 85.979,158.623 85.979,167.005
HV_Conv_In on Top Layer "HV_CONV_IN_L01_P015" (solid, pour order 15): 82.292,131.064 98.425,131.064 98.425,117.475 82.147,117.475
GND on Top Layer "Top Layer-GND" (solid, pour order 13): 87.249,146.939 90.551,146.939 90.551,155.194 83.058,155.194 83.058,166.497 80.518,166.497 80.518,151.892 68.834,151.892 68.834,149.606 81.661,149.606 81.661,150.176 83.058,150.872 83.058,153.797 88.646,153.797 88.646,148.971 87.249,148.971
7.4V on Top Layer "7.4V_L01_P003" (solid, pour order 3): 66.675,142.367 72.263,142.367 72.263,147.828 81.534,147.828 81.534,146.177 73.66,146.177 73.66,140.208 66.675,140.208
7.4V on Top Layer "7.4V_L01_P004" (solid, pour order 4): 79.883,147.447 79.883,148.463 81.534,148.463 81.534,147.447
no net on Top Layer "NONET_L01_P000" (solid, pour order 0): 68.707,152.019
GND on Bottom Layer "GND_L02_P023" (solid, pour order 23): 66.61,198.247 140.843,198.247 140.843,95.504 66.736,95.504
no net on Bottom Layer "NONET_L02_P014" (solid, pour order 14): 82.169,130.683

## Keep-outs
Keep-Out Layer:
  the board outline again, w0.381

## Silkscreen, mask and mechanical layers (free items; w line width, h text height)
Top Overlay:
  lines w0.381: 90.932,94.234 90.932,126.873 138.811,126.873 138.811,197.612
  text "MISO" at 74.549,194.691 h0.76
  text "MOSI" at 78.105,194.691 h0.76
  text "D9" at 81.28,194.691 h0.76
  text "D8" at 83.82,194.691 h0.76
  text "D7" at 86.487,194.691 h0.76
  text "D6" at 88.9,194.691 h0.76
  text "RX" at 91.44,194.691 h0.76
  text "TX" at 95.25,194.691 h0.76
  text "GND" at 75.311,169.545 h0.76
  text "SCK" at 78.105,169.545 h0.76
  text "A0" at 81.026,169.545 h0.76
  text "A1" at 83.566,169.545 h0.76
  text "A2" at 86.106,169.545 h0.76
  text "A3" at 88.646,169.545 h0.76
  text "SDA" at 90.932,169.545 h0.76
  text "SCL" at 93.726,168.91 h0.76
  text "GND" at 65.278,151.638 h0.76 r270
  text "7.4V" at 65.278,147.955 h0.76 r270

## Text inside footprints (layer, text, board x,y; h text height)
OC_0L+: Top Overlay "4" at 168.349,110.528 h1.52 r90; Top Overlay "3" at 160.149,110.428 h1.52 r90; Top Overlay "6" at 168.402,123.19 h1.52 r90; Top Overlay "5" at 160.147,123.317 h1.52 r90; Top Overlay "2" at 168.148,133.35 h1.52 r90; Top Overlay "1" at 160.149,133.728 h1.52 r90
OC_0L-: Top Overlay "4" at 171.742,100.764 h1.52; Top Overlay "3" at 171.642,108.964 h1.52; Top Overlay "6" at 184.404,100.711 h1.52; Top Overlay "5" at 184.531,108.966 h1.52; Top Overlay "2" at 194.564,100.965 h1.52; Top Overlay "1" at 194.942,108.964 h1.52
OC_0R+: Top Overlay "1" at 191.01,142.11 h1.52 r90; Top Overlay "2" at 199.009,141.732 h1.52 r90; Top Overlay "5" at 191.008,131.699 h1.52 r90; Top Overlay "6" at 199.263,131.572 h1.52 r90; Top Overlay "3" at 191.01,118.81 h1.52 r90; Top Overlay "4" at 199.21,118.91 h1.52 r90
OC_0R-: Top Overlay "1" at 225.93,117.346 h1.52; Top Overlay "2" at 225.552,109.347 h1.52; Top Overlay "5" at 215.519,117.348 h1.52; Top Overlay "6" at 215.392,109.093 h1.52; Top Overlay "3" at 202.63,117.346 h1.52; Top Overlay "4" at 202.73,109.146 h1.52
OC_1L+: Top Overlay "1" at 155.958,186.306 h1.52 r90; Top Overlay "2" at 163.957,185.928 h1.52 r90; Top Overlay "5" at 155.956,175.895 h1.52 r90; Top Overlay "6" at 164.211,175.768 h1.52 r90; Top Overlay "3" at 155.958,163.006 h1.52 r90; Top Overlay "4" at 164.158,163.106 h1.52 r90
OC_1L-: Top Overlay "4" at 167.551,153.215 h1.52; Top Overlay "3" at 167.451,161.415 h1.52; Top Overlay "6" at 180.213,153.162 h1.52; Top Overlay "5" at 180.34,161.417 h1.52; Top Overlay "2" at 190.373,153.416 h1.52; Top Overlay "1" at 190.751,161.415 h1.52
OC_1R+: Top Overlay "1" at 187.2,193.164 h1.52 r90; Top Overlay "2" at 195.199,192.786 h1.52 r90; Top Overlay "5" at 187.198,182.753 h1.52 r90; Top Overlay "6" at 195.453,182.626 h1.52 r90; Top Overlay "3" at 187.2,169.864 h1.52 r90; Top Overlay "4" at 195.4,169.964 h1.52 r90
OC_1R-: Top Overlay "1" at 222.12,168.146 h1.52; Top Overlay "2" at 221.742,160.147 h1.52; Top Overlay "5" at 211.709,168.148 h1.52; Top Overlay "6" at 211.582,159.893 h1.52; Top Overlay "3" at 198.82,168.146 h1.52; Top Overlay "4" at 198.92,159.946 h1.52
S5V: Top Overlay "0" at 70.104,123.698 h1.02 r90; Top Overlay "1" at 70.104,132.207 h1.02 r90
SBAT: Top Overlay "0" at 70.104,133.731 h1.02 r90; Top Overlay "1" at 70.104,142.24 h1.02 r90